# Altium PCB PC110.PcbDoc (part 3 of 24)
Units mm, origin at the board's own origin, x right, y up, seen from the top; angles counter-clockwise.
Board outline 150.05 x 107.35 mm, 10 copper layers (In2.Cu, F.Cu, B.Cu, In1.Cu, In3.Cu, In4.Cu, In5.Cu, In6.Cu, In7.Cu, In8.Cu); 936 components, 1434 nets, 4891 pads, 6088 vias.
Unrouted connection lines stored in the file: 2995.
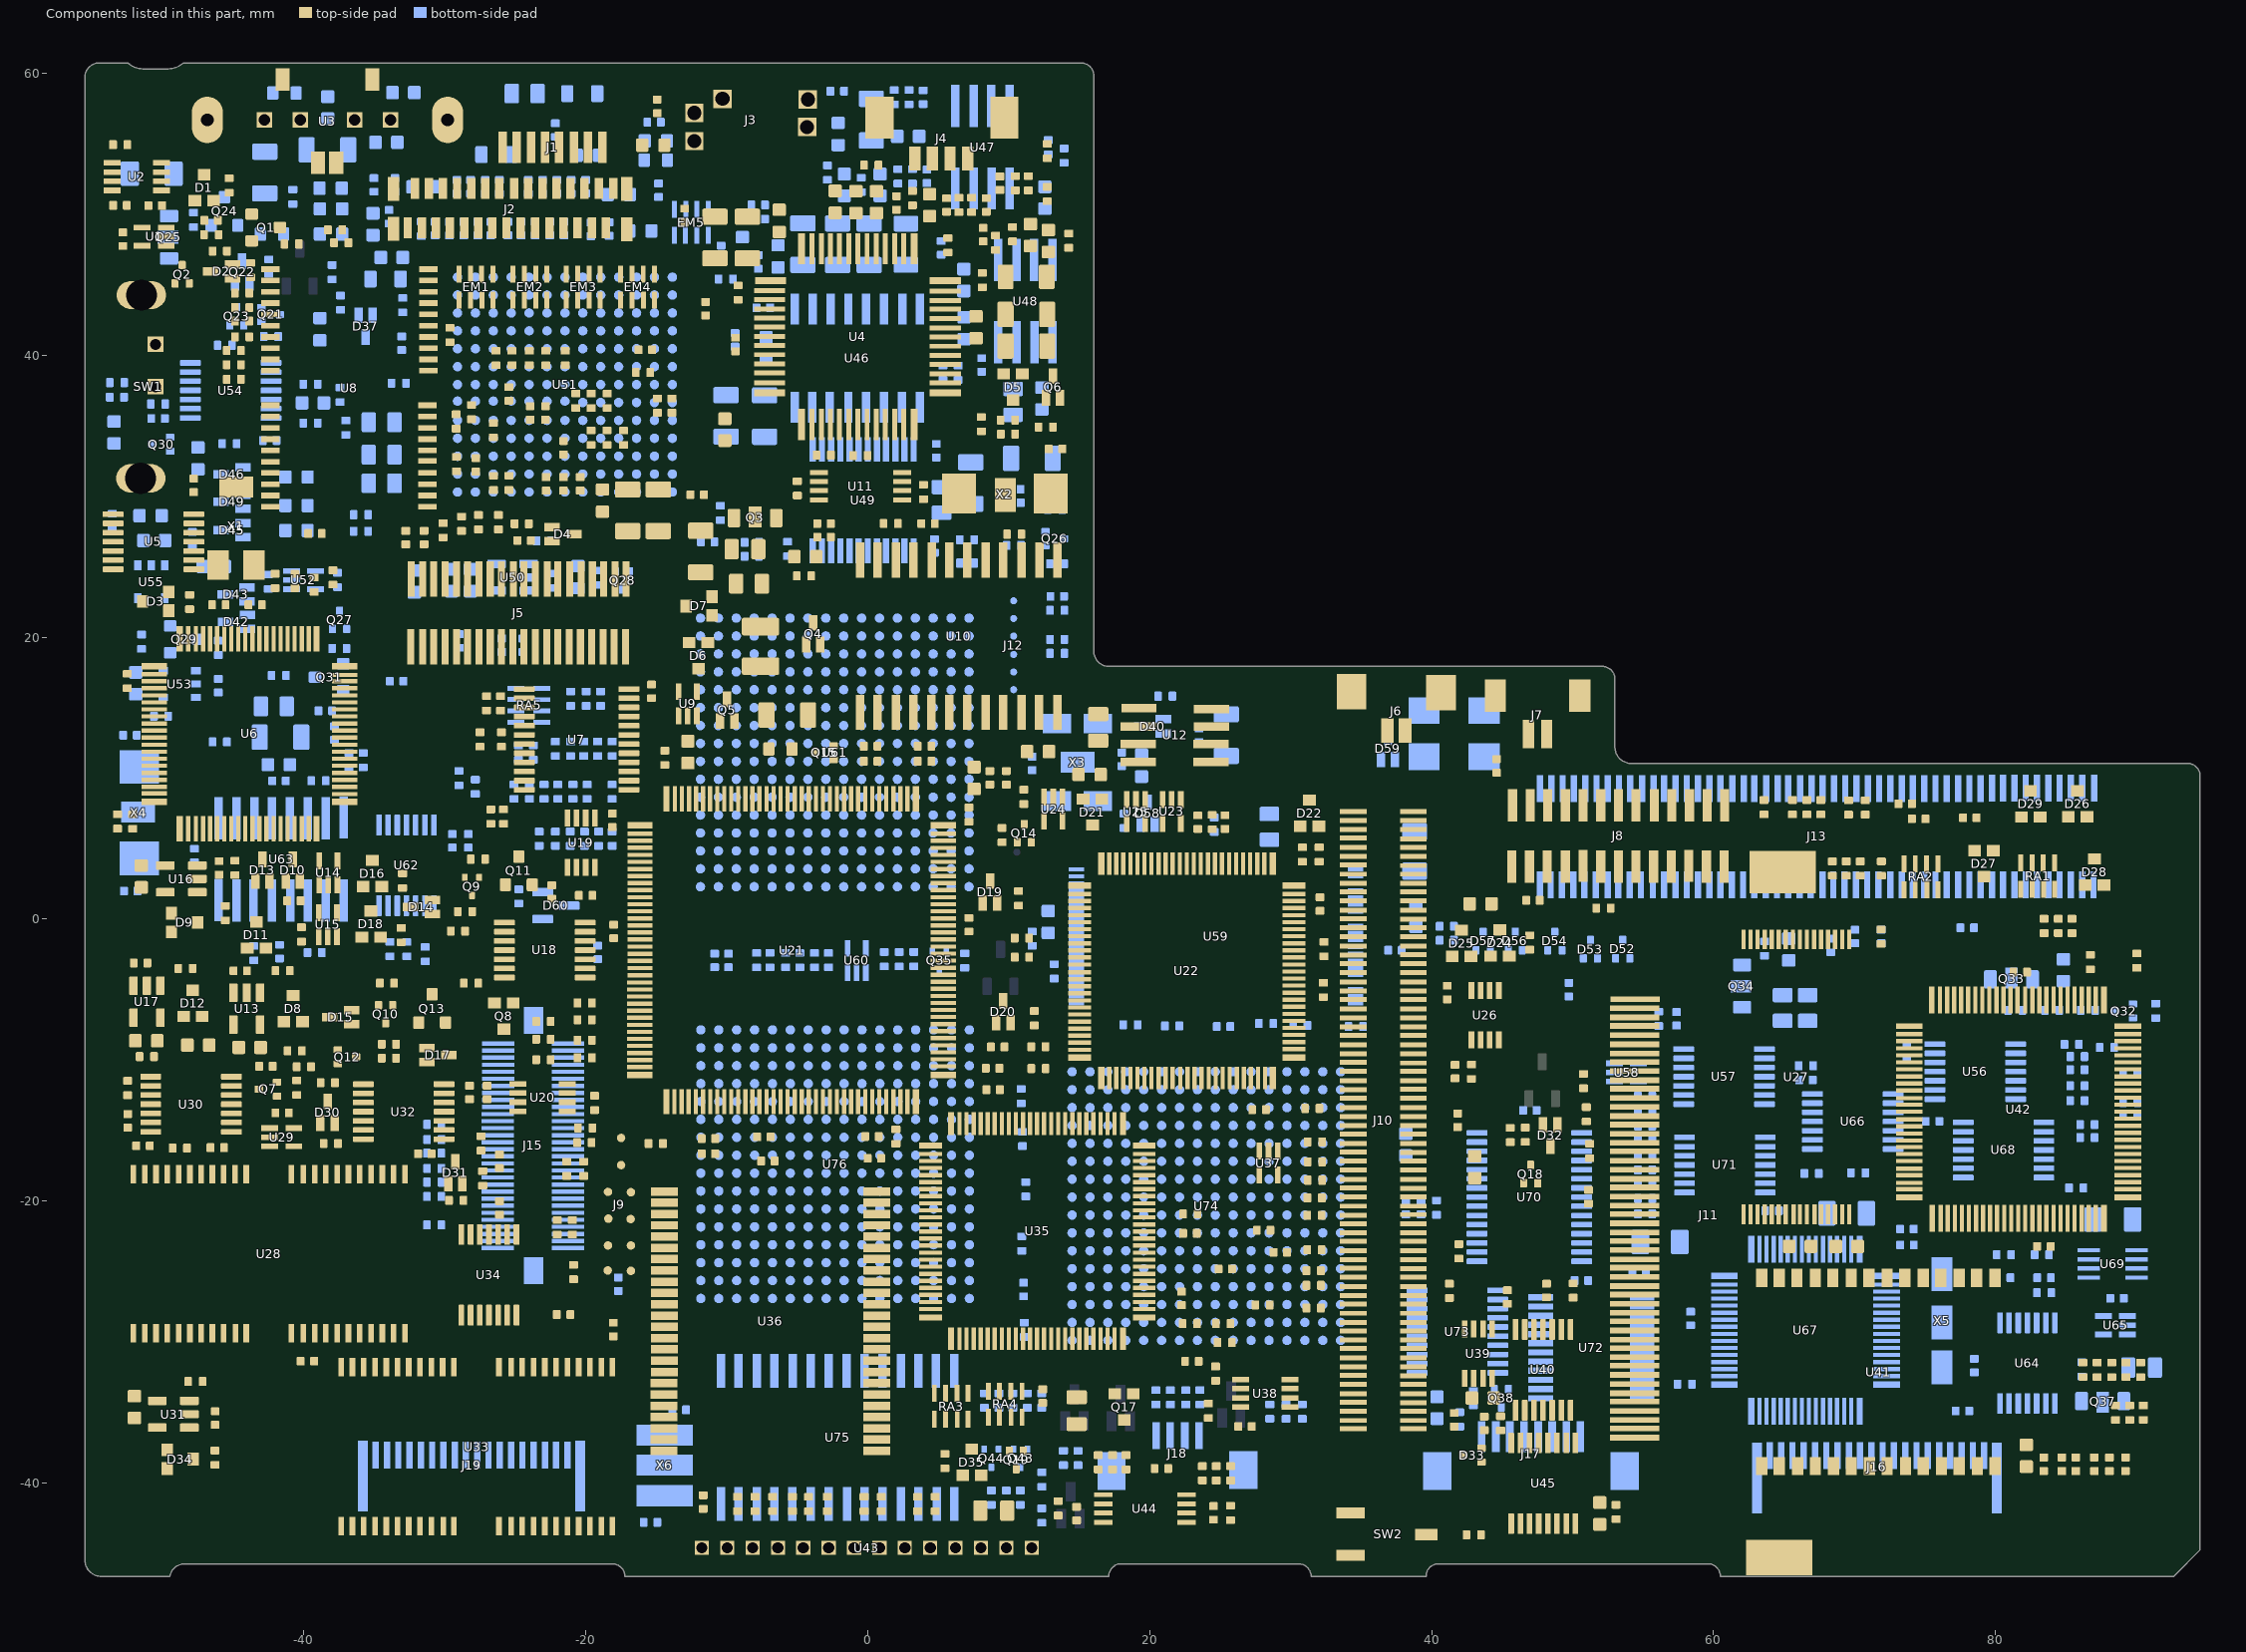
[diagram p11: the components of this part, seen from the top]

## Components (designator, comment, footprint, x,y, rotation, side; value= is the part's Value field where it differs from the comment) (continued)
R388 "Comment" R_0402_1005Metric#2 23.56,-33.91 r270 bottom value=3K
R389 "Comment" R_0402_1005Metric#2 30.82,-34.92 r270 bottom value=10k
R390 "Comment" R_0402_1005Metric#2 21.47,-33.91 r270 bottom value=100k
R391 "Comment" R_0402_1005Metric#2 12.35,-34.14 r270 bottom value=10k
R392 "Comment" R_0402_1005Metric#2 10.3,-34.14 r270 bottom value=22k
R393 "Comment" R_0402_1005Metric#2 11.2,-19.15 r270 bottom value=47k
R394 "Comment" R_0402_1005Metric#2 8.27,-34.14 r270 bottom value=DNP
R395 "Comment" R_0402_1005Metric#2 10.98,-15.58 r270 bottom value=10k
R396 "Comment" R_0402_1005Metric#2 11.1,-29.12 r270 bottom value=10k
R397 "Comment" R_0402_1005Metric#2 10.93,-23.01 r270 bottom value=47k
R398 "Comment" R_0402_1005Metric#2 9.3,-34.14 r270 bottom value=22k
R399 "Comment" R_0402_1005Metric#2 11.32,-34.14 r270 bottom value=22k
R400 "Comment" R_0402_1005Metric#2 -30.75,-15.63 r0 bottom value=DNP
R401 "Comment" R_0402_1005Metric#2 -30.75,-19.67 r0 bottom value=100k
R402 "Comment" R_0402_1005Metric#2 -30.75,-18.65 r0 bottom value=DNP
R403 "Comment" R_0402_1005Metric#2 -30.75,-16.59 r0 bottom value=DNP
R404 "Comment" R_0402_1005Metric#2 -30.75,-14.55 r0 bottom value=100k
R405 "Comment" R_0402_1005Metric#2 -30.75,-21.69 r0 bottom value=100k
R406 "Comment" R_0402_1005Metric#2 -30.75,-17.68 r0 bottom value=100k
R407 "Comment" R_0402_1005Metric#2 13.88,-38.21 r270 bottom value=100k
R408 "Comment" R_0402_1005Metric#2 14.91,-38.21 r270 bottom value=47k
R409 "Comment" R_0402_1005Metric#2 8.77,-41.03 r270 bottom value=2.2k
R410 "Comment" R_0402_1005Metric#2 9.82,-41.03 r270 bottom value=20k
R411 "Comment" R_0402_1005Metric#2 12.35,-42.3 r270 bottom value=47k
R412 "Comment" R_0402_1005Metric#2 10.83,-41.03 r270 bottom value=7.5k
R413 "Comment" R_0402_1005Metric#2 12.35,-39.74 r270 bottom value=100k
RA1 "Comment" R-array#1 82.96,2.98 r0 top value=47k
RA2 "Comment" R-array#1 74.68,2.94 r0 top value=10k
RA3 "Comment" R-array#1 5.9,-34.62 r0 top value=22k
RA4 "Comment" R-array#1 9.72,-34.47 r0 top value=10k
RA5 "Comment" R-array#2 -24.11,15.15 r270 bottom value=470k
SW1 "Comment" Switch -51.47,37.52 r0 top value=Switch
SW2 "Comment" LidSwitch 37.05,-43.64 r0 top value=LidSwitch
U1 "Comment" SOT-353#1 -50.61,48.41 r180 top value=EA
U2 "Comment" sso-8 -51.84,52.64 r180 top value=7W32
U3 "Comment" IRDA -38.35,55.15 r0 top value="HSDL-1000 X03"
U4 "Comment" QFN-52 -0.3,41.29 r0 top value=ES488F
U5 "Comment" TSSOP-14_4.4x5mm_P0.65mm#1 -50.67,26.77 r0 top value=74HC14
U6 "Comment" QFN-80 -43.65,13.13 r0 top value=M38223E4HP
U7 "Comment" TSSOP-24_6.1x7.8mm_P0.65mm -20.65,12.75 r0 top value=HD151015
U8 "Comment" GRAMchip -36.92,37.7 r90 top value=51W4260ATT7
U9 "Comment" SOT-353#1 -12.77,15.29 r90 top value=E4
U10 "Comment" SOP-24 6.75,20.72 r0 top value=YM3812
U11 "Comment" soic-8-small -0.51,30.69 r180 top value=NJM2904M
U12 "Comment" SOIC-8-narrow 22.04,13.16 r0 top value=LM4861
U13 "Comment" SOT-23-5#1 -44.05,-6.35 r270 top value=8C01
U14 "Comment" SOT-353#1 -38.26,3.3 r90 top value=EA
U15 "Comment" SOT-353#1 -38.3,-0.38 r90 top value=EA
U16 "Comment" SOT-23-5#1 -48.69,2.86 r180 top value=8C01
U17 "Comment" SOT-23-5#1 -51.13,-5.85 r270 top value=3E00
U18 "Comment" TSSOP-14_4.4x5mm_P0.65mm#1 -22.912,-2.19 r0 top value=VT74
U19 "Comment" sso-8 -20.31,5.44 r270 top value=7W126
U20 "Comment" sso-8 -23.07,-12.63 r0 top value=7W14
U21 "Comment" Bowman -5.18,-1.69 r0 top value=Bowman
U22 "Comment" FDC 22.93,-3.21 r0 top value=FDC37C665IR
U23 "Comment" SOT-353#1 21.56,7.65 r270 top value=EA
U24 "Comment" SOT-353#1 13.16,7.8 r270 top value=E4
U25 "Comment" SOT-353#1 19.02,7.63 r270 top value=E4
U26 "Comment" sso-8 43.77,-6.8 r90 top value=7W126
U27 "Comment" Flash-32 65.47,-11.43 r270 top value=AT29LV512-12TU
U28 "Comment" RAMchip -42.06,-23.57 r0 top value=M5M4V16160BTP
U29 "Comment" SOT-353#1 -41.56,-15.46 r0 top value=E2
U30 "Comment" TSSOP-14_4.4x5mm_P0.65mm#1 -47.998,-13.12 r0 top value=74LVT74
U31 "Comment" SOT-23-5#1 -49.26,-35.11 r180 top value=3F01
U32 "Comment" TSSOP-14_4.4x5mm_P0.65mm#1 -32.918,-13.65 r0 top value=V74
U33 "Comment" RAMchip -27.33,-37.25 r0 top value=M5M4V16160BTP
U34 "Comment" TSSOP-14_4.4x5mm_P0.65mm#1 -26.87,-25.222 r270 top value=74LV126
U35 "Comment" Pluto 12.01,-21.65 r0 top value=Pluto
U36 "Comment" SOP48 -6.67,-28.16 r0 top value=MSM538032E
U37 "Comment" SOT-353#1 28.43,-17.3 r270 top value=E8
U38 "Comment" sso-8 28.19,-33.65 r180 top value=7W14
U39 "Comment" sso-8 43.34,-30.8 r270 top value=7W00
U40 "Comment" TSSOP-14_4.4x5mm_P0.65mm#1 47.9,-31.962 r90 top value=SN74LS74a
U41 "Comment" SanDisk 72.31,-31.815 r0 top value=SDLB-4
U42 "Comment" QFN-100 82.11,-13.65 r0 top value=SC414281PU4
U43 "Comment" LCD 0.13,-44.59 r0 top value="Front LCD"
U44 "Comment" soic-8-small 19.66,-41.77 r0 top value=NJM2904M
U45 "Comment" TSSOP-16_4.4x5mm_P0.65mm 47.92,-40.01 r90 top value=SN74LS123A
U46 "Comment" SOP-16 -0.74,39.82 r90 bottom value=Y3014
U47 "Comment" SOIC-8 8.16,54.73 r90 bottom value=3414A
U48 "Comment" SOIC-8 11.21,43.81 r90 bottom value=DS1669
U49 "Comment" SSOP-24_5.3x8.2mm_P0.65mm -0.32,29.72 r270 bottom value=HD151015
U50 "Comment" SOT-23-5#2 -25.19,24.25 r0 bottom value=3T01
U51 "Comment" BGA-169 -21.48,37.92 r0 bottom value=CHIPS65535
U52 "Comment" SOT-353#2 -40.03,24.05 r180 bottom value=EA
U53 "Comment" TSOP-5_1.65x3.05mm_P0.95mm -48.81,16.68 r0 bottom value=3F01
U54 "Comment" TSSOP-14_4.4x5mm_P0.65mm#2 -45.193,37.51 r180 bottom value=SN74HC74
U55 "Comment" TSOP-5_1.65x3.05mm_P0.95mm -50.82,23.93 r90 bottom value=3T01
U56 "Comment" TSSOP-14_4.4x5mm_P0.65mm#2 78.56,-10.81 r0 bottom value=SN74LV32
U57 "Comment" TSSOP-14_4.4x5mm_P0.65mm#2 60.74,-11.17 r0 bottom value=SN74LVT125
U58 "Comment" SOT-353#2 53.83,-10.87 r180 bottom value=EA
U59 "Comment" Flash-40 24.59,-0.56 r0 bottom value=28F002BX
U60 "Comment" SOT-353#2 -0.79,-2.92 r270 bottom value=E3
U61 "Comment" BGA-256 -2.34,11.83 r0 bottom value=VL82C420
U62 "Comment" TSSOP-14_4.4x5mm_P0.65mm#2 -32.72,3.82 r270 bottom value=SN74LVT125
U63 "Comment" SOIC-16W -41.61,4.31 r90 bottom value=AV9154A-27
U64 "Comment" TSSOP-14_4.4x5mm_P0.65mm#2 82.26,-31.49 r90 bottom value=SN74LV126
U65 "Comment" SOT-353#2 88.51,-28.8 r0 bottom value=E4
U66 "Comment" TSSOP-14_4.4x5mm_P0.65mm#2 69.87,-14.35 r0 bottom value=SN74LV02
U67 "Comment" QFN64 66.26,-29.41 r90 bottom value=M38813M4
U68 "Comment" TSSOP-14_4.4x5mm_P0.65mm#2 80.567,-16.37 r0 bottom value=SN74LV08
U69 "Comment" SSOP-8_2.95x2.8mm_P0.65mm 88.31,-24.45 r0 bottom value=SN74LVC2G32
U70 "Comment" TSSOP-30_6.1x9.7mm_P0.65mm 46.932,-19.71 r0 bottom value=TPS2201
U71 "Comment" TSSOP-14_4.4x5mm_P0.65mm#2 60.8,-17.43 r180 bottom value=SN74LV32
U72 "Comment" SSOP-24_5.3x8.2mm_P0.65mm 51.33,-30.4 r0 bottom value=HD151015
U73 "Comment" TSSOP-20_4.4x6.5mm_P0.65mm 41.83,-29.25 r0 bottom value=SN74LVT244B
U74 "Comment" BGA-256 24.02,-20.345 r90 bottom value=RB5C396
U75 "Comment" SSOP-28 -2.56,-37.29 r0 bottom value=D17137AGT
U76 "Comment" BGA-256 -2.315,-17.375 r0 bottom value=486SX-33
X1 "Comment" XTAL-2 -44.83,30.66 r0 top value=245759
X2 "Comment" XTAL-1 9.72,30.09 r0 top value=89G6821
X3 "Comment" XTAL-3 14.88,11.13 r0 bottom value=32768
X4 "Comment" XTAL-6 -51.76,7.55 r270 bottom value=59G3482
X5 "Comment" XTAL-5 76.2,-28.59 r0 bottom value=4.00
X6 "Comment" XTAL-4 -14.56,-38.79 r0 bottom value=8.00

## Footprints (in the part's own frame and the unit in brackets; to place one, negate y for a bottom-side part, rotate by r counter-clockwise, add the part's x,y. Pads: shape width x height; smd on the part's side, far side on the other; paste and mask are expansions set on the pad)
3D [mm]
  rect 0.9x0.8 smd paste-0.9 mask+0: 1(0.625,-0.725) 2(-0.05,1.125) 3(-0.7,-0.725)
Audio-Jack [mm]
  rect 1.3x1.3 hole 1 paste-2539.97 mask+0: 1(3.95,2.95) 2(3.9,1) 3(-2.1,3) 4(-4.1,2) 5(-4.1,0)
  Edge.Cuts circle w0.254: c1.9,-2.05 r0.791
  Edge.Cuts circle w0.254: c1.9,1.95 r0.791
  Edge.Cuts circle w0.254: c-2.1,0.95 r0.791
  Edge.Cuts circle w0: c-2.1,0.95 r0.791
BGA-169 [mm]
  round 0.67 smd paste-0.67 mask+0: A1(-7.62,-7.62) A2(-7.62,-6.35) A3(-7.62,-5.08) A4(-7.62,-3.81) A5(-7.62,-2.54) A6(-7.62,-1.27) A7(-7.62,0) A8(-7.62,1.175) A9(-7.62,2.54) A10(-7.62,3.81) A11(-7.62,5.08) A12(-7.62,6.35) A13(-7.62,7.62) B1(-6.35,-7.62) B2(-6.35,-6.35) B3(-6.35,-5.08) B4(-6.35,-3.81) B5(-6.35,-2.54) B6(-6.35,-1.27) B7(-6.35,0) B8(-6.35,1.175) B9(-6.35,2.54) B10(-6.35,3.81) B11(-6.35,5.08) B12(-6.35,6.35) B13(-6.35,7.62) C1(-5.08,-7.62) C2(-5.08,-6.35) C3(-5.08,-5.08) C4(-5.08,-3.81) C5(-5.08,-2.54) C6(-5.08,-1.27) C7(-5.08,0) C8(-5.08,1.175) C9(-5.08,2.54) C10(-5.08,3.81) C11(-5.08,5.08) C12(-5.08,6.35) C13(-5.08,7.62) D1(-3.81,-7.62) D2(-3.81,-6.35) D3(-3.81,-5.08) D4(-3.81,-3.81) D5(-3.81,-2.54) D6(-3.81,-1.27) D7(-3.81,0) D8(-3.81,1.175) D9(-3.81,2.54) D10(-3.81,3.81) D11(-3.81,5.08) D12(-3.81,6.35) D13(-3.81,7.62) E1(-2.54,-7.62) E2(-2.54,-6.35) E3(-2.54,-5.08) E4(-2.54,-3.81) E5(-2.54,-2.54) E6(-2.54,-1.27) E7(-2.54,0) E8(-2.54,1.175) E9(-2.54,2.54) E10(-2.54,3.81) E11(-2.54,5.08) E12(-2.54,6.35) E13(-2.54,7.62) F1(-1.27,-7.62) F2(-1.27,-6.35) F3(-1.27,-5.08) F4(-1.27,-3.81) F5(-1.27,-2.54) F6(-1.27,-1.27) F7(-1.27,0) F8(-1.27,1.175) F9(-1.27,2.54) F10(-1.27,3.81) F11(-1.27,5.08) F12(-1.27,6.35) F13(-1.27,7.62) G1(0,-7.62) G2(0,-6.35) G3(0,-5.08) G4(0,-3.81) G5(0,-2.54) G6(0,-1.27) G7(0,0) G8(0,1.175) G9(0,2.54) G10(0,3.81) G11(0,5.08) G12(0,6.35) G13(0,7.62) H1(1.27,-7.62) H2(1.27,-6.35) H3(1.27,-5.08) H4(1.27,-3.81) H5(1.27,-2.54) H6(1.27,-1.27) H7(1.27,0) H8(1.27,1.27) H9(1.27,2.54) H10(1.27,3.81) H11(1.27,5.08) H12(1.27,6.35) H13(1.27,7.62) J1(2.54,-7.62) J2(2.54,-6.35) J3(2.54,-5.08) J4(2.54,-3.81) J5(2.54,-2.54) J6(2.54,-1.27) J7(2.54,0) J8(2.54,1.27) J9(2.54,2.54) J10(2.54,3.81) J11(2.54,5.08) J12(2.54,6.35) J13(2.54,7.62) K1(3.81,-7.62) K2(3.81,-6.35) K3(3.81,-5.08) K4(3.81,-3.81) K5(3.81,-2.54) K6(3.81,-1.27) K7(3.81,0) K8(3.81,1.27) K9(3.81,2.54) K10(3.81,3.81) K11(3.81,5.08) K12(3.81,6.35) K13(3.81,7.62) L1(5.08,-7.62) L2(5.08,-6.35) L3(5.08,-5.08) L4(5.08,-3.81) L5(5.08,-2.54) L6(5.08,-1.27) L7(5.08,0) L8(5.08,1.27) L9(5.08,2.54) L10(5.08,3.81) L11(5.08,5.08) L12(5.08,6.35) L13(5.08,7.62) M1(6.35,-7.62) M2(6.35,-6.35) M3(6.35,-5.08) M4(6.35,-3.81) M5(6.35,-2.54) M6(6.35,-1.27) M7(6.35,0) M8(6.35,1.27) M9(6.35,2.54) M10(6.35,3.81) M11(6.35,5.08) M12(6.35,6.35) M13(6.35,7.62) N1(7.62,-7.62) N2(7.62,-6.35) N3(7.62,-5.08) N4(7.62,-3.81) N5(7.62,-2.54) N6(7.62,-1.27) N7(7.62,0) N8(7.62,1.27) N9(7.62,2.54) N10(7.62,3.81) N11(7.62,5.08) N12(7.62,6.35) N13(7.62,7.62)
  silkscreen extent -9.4,-9.4 9.4,9.4
BGA-256 [mm]
  round 0.67 smd paste-0.67 mask+0: A1(-9.525,-9.525) A2(-9.525,-8.255) A3(-9.525,-6.985) A4(-9.525,-5.715) A5(-9.525,-4.445) A6(-9.525,-3.175) A7(-9.525,-1.905) A8(-9.525,-0.635) A9(-9.525,0.635) A10(-9.525,1.905) A11(-9.525,3.175) A12(-9.525,4.445) A13(-9.525,5.715) A14(-9.525,6.985) A15(-9.525,8.255) A16(-9.525,9.525) B1(-8.255,-9.525) B2(-8.255,-8.255) B3(-8.255,-6.985) B4(-8.255,-5.715) B5(-8.255,-4.445) B6(-8.255,-3.175) B7(-8.255,-1.905) B8(-8.255,-0.635) B9(-8.255,0.635) B10(-8.255,1.905) B11(-8.255,3.175) B12(-8.255,4.445) B13(-8.255,5.715) B14(-8.255,6.985) B15(-8.255,8.255) B16(-8.255,9.525) C1(-6.985,-9.525) C2(-6.985,-8.255) C3(-6.985,-6.985) C4(-6.985,-5.715) C5(-6.985,-4.445) C6(-6.985,-3.175) C7(-6.985,-1.905) C8(-6.985,-0.635) C9(-6.985,0.635) C10(-6.985,1.905) C11(-6.985,3.175) C12(-6.985,4.445) C13(-6.985,5.715) C14(-6.985,6.985) C15(-6.985,8.255) C16(-6.985,9.525) D1(-5.715,-9.525) D2(-5.715,-8.255) D3(-5.715,-6.985) D4(-5.715,-5.715) D5(-5.715,-4.445) D6(-5.715,-3.175) D7(-5.715,-1.905) D8(-5.715,-0.635) D9(-5.715,0.635) D10(-5.715,1.905) D11(-5.715,3.175) D12(-5.715,4.445) D13(-5.715,5.715) D14(-5.715,6.985) D15(-5.715,8.255) D16(-5.715,9.525) E1(-4.445,-9.525) E2(-4.445,-8.255) E3(-4.445,-6.985) E4(-4.445,-5.715) E5(-4.445,-4.445) E6(-4.445,-3.175) E7(-4.445,-1.905) E8(-4.445,-0.635) E9(-4.445,0.635) E10(-4.445,1.905) E11(-4.445,3.175) E12(-4.445,4.445) E13(-4.445,5.715) E14(-4.445,6.985) E15(-4.445,8.255) E16(-4.445,9.525) F1(-3.175,-9.525) F2(-3.175,-8.255) F3(-3.175,-6.985) F4(-3.175,-5.715) F5(-3.175,-4.445) F6(-3.175,-3.175) F7(-3.175,-1.905) F8(-3.175,-0.635) F9(-3.175,0.635) F10(-3.175,1.905) F11(-3.175,3.175) F12(-3.175,4.445) F13(-3.175,5.715) F14(-3.175,6.985) F15(-3.175,8.255) F16(-3.175,9.525) G1(-1.905,-9.525) G2(-1.905,-8.255) G3(-1.905,-6.985) G4(-1.905,-5.715) G5(-1.905,-4.445) G6(-1.905,-3.175) G7(-1.905,-1.905) G8(-1.905,-0.635) G9(-1.905,0.635) G10(-1.905,1.905) G11(-1.905,3.175) G12(-1.905,4.445) G13(-1.905,5.715) G14(-1.905,6.985) G15(-1.905,8.255) G16(-1.905,9.525) H1(-0.635,-9.525) H2(-0.635,-8.255) H3(-0.635,-6.985) H4(-0.635,-5.715) H5(-0.635,-4.445) H6(-0.635,-3.175) H7(-0.635,-1.905) H8(-0.635,-0.635) H9(-0.635,0.635) H10(-0.635,1.905) H11(-0.635,3.175) H12(-0.635,4.445) H13(-0.635,5.715) H14(-0.635,6.985) H15(-0.635,8.255) H16(-0.635,9.525) J1(0.635,-9.525) J2(0.635,-8.255) J3(0.635,-6.985) J4(0.635,-5.715) J5(0.635,-4.445) J6(0.635,-3.175) J7(0.635,-1.905) J8(0.635,-0.635) J9(0.635,0.635) J10(0.635,1.905) J11(0.635,3.175) J12(0.635,4.445) J13(0.635,5.715) J14(0.635,6.985) J15(0.635,8.255) J16(0.635,9.525) K1(1.905,-9.525) K2(1.905,-8.255) K3(1.905,-6.985) K4(1.905,-5.715) K5(1.905,-4.445) K6(1.905,-3.175) K7(1.905,-1.905) K8(1.905,-0.635) K9(1.905,0.635) K10(1.905,1.905) K11(1.905,3.175) K12(1.905,4.445) K13(1.905,5.715) K14(1.905,6.985) K15(1.905,8.255) K16(1.905,9.525) L1(3.175,-9.525) L2(3.175,-8.255) L3(3.175,-6.985) L4(3.175,-5.715) L5(3.175,-4.445) L6(3.175,-3.175) L7(3.175,-1.905) L8(3.175,-0.635) L9(3.175,0.635) L10(3.175,1.905) L11(3.175,3.175) L12(3.175,4.445) L13(3.175,5.715) L14(3.175,6.985) L15(3.175,8.255) L16(3.175,9.525) M1(4.445,-9.525) M2(4.445,-8.255) M3(4.445,-6.985) M4(4.445,-5.715) M5(4.445,-4.445) M6(4.445,-3.175) M7(4.445,-1.905) M8(4.445,-0.635) M9(4.445,0.635) M10(4.445,1.905) M11(4.445,3.175) M12(4.445,4.445) M13(4.445,5.715) M14(4.445,6.985) M15(4.445,8.255) M16(4.445,9.525) N1(5.715,-9.525) N2(5.715,-8.255) N3(5.715,-6.985) N4(5.715,-5.715) N5(5.715,-4.445) N6(5.715,-3.175) N7(5.715,-1.905) N8(5.715,-0.635) N9(5.715,0.635) N10(5.715,1.905) N11(5.715,3.175) N12(5.715,4.445) N13(5.715,5.715) N14(5.715,6.985) N15(5.715,8.255) N16(5.715,9.525) P1(6.985,-9.525) P2(6.985,-8.255) P3(6.985,-6.985) P4(6.985,-5.715) P5(6.985,-4.445) P6(6.985,-3.175) P7(6.985,-1.905) P8(6.985,-0.635) P9(6.985,0.635) P10(6.985,1.905) P11(6.985,3.175) P12(6.985,4.445) P13(6.985,5.715) P14(6.985,6.985) P15(6.985,8.255) P16(6.985,9.525) R1(8.255,-9.525) R2(8.255,-8.255) R3(8.255,-6.985) R4(8.255,-5.715) R5(8.255,-4.445) R6(8.255,-3.175) R7(8.255,-1.905) R8(8.255,-0.635) R9(8.255,0.635) R10(8.255,1.905) R11(8.255,3.175) R12(8.255,4.445) R13(8.255,5.715) R14(8.255,6.985) R15(8.255,8.255) R16(8.255,9.525) T1(9.525,-9.525) T2(9.525,-8.255) T3(9.525,-6.985) T4(9.525,-5.715) T5(9.525,-4.445) T6(9.525,-3.175) T7(9.525,-1.905) T8(9.525,-0.635) T9(9.525,0.635) T10(9.525,1.905) T11(9.525,3.175) T12(9.525,4.445) T13(9.525,5.715) T14(9.525,6.985) T15(9.525,8.255) T16(9.525,9.525)
  silkscreen extent -11.3,-11.3 11.43,11.43
Bowman [mm]
  rect 1.8x0.45 smd paste-1.8 mask+0: 1(-10.973,8.35) 36(-11,-9.35) 73(10.55,-9.35) 108(10.55,8.35)
  rect 1.8x0.3 smd paste-1.8 mask+0: 2(-10.973,7.75) 3(-10.973,7.25) 4(-10.973,6.757) 5(-10.973,6.25) 6(-10.973,5.75) 7(-10.973,5.25) 8(-10.973,4.75) 9(-10.973,4.25) 10(-10.973,3.75) 11(-10.973,3.252) 12(-10.973,2.75) 13(-10.973,2.25) 14(-10.973,1.75) 15(-10.973,1.25) 16(-10.973,0.75) 17(-10.973,0.25) 18(-10.973,-0.253) 19(-10.973,-0.761) 20(-10.973,-1.269) 21(-10.973,-1.777) 22(-10.973,-2.285) 23(-11,-2.793) 24(-11,-3.3) 25(-11,-3.8) 26(-11,-4.3) 27(-11,-4.8) 28(-11,-5.3) 29(-11,-5.8) 30(-11,-6.3) 31(-11,-6.8) 32(-11,-7.3) 33(-11,-7.8) 34(-11,-8.3) 35(-11,-8.8) 74(10.55,-8.75) 75(10.55,-8.25) 76(10.55,-7.75) 77(10.55,-7.25) 78(10.55,-6.75) 79(10.55,-6.25) 80(10.55,-5.75) 81(10.55,-5.25) 82(10.55,-4.75) 83(10.55,-4.25) 84(10.55,-3.75) 85(10.55,-3.25) 86(10.55,-2.75) 87(10.55,-2.25) 88(10.55,-1.75) 89(10.55,-1.25) 90(10.55,-0.75) 91(10.55,-0.25) 92(10.55,0.25) 93(10.55,0.75) 94(10.55,1.25) 95(10.55,1.75) 96(10.55,2.25) 97(10.55,2.75) 98(10.55,3.25) 99(10.55,3.75) 100(10.55,4.25) 101(10.55,4.75) 102(10.55,5.25) 103(10.55,5.75) 104(10.55,6.25) 105(10.55,6.75) 106(10.55,7.25) 107(10.55,7.75)
  rect 0.45x1.8 smd paste-1.8 mask+0: 37(-9.1,-11.25) 72(8.6,-11.25) 109(8.6,10.225) 144(-9.1,10.225)
  rect 0.3x1.8 smd paste-1.8 mask+0: 38(-8.534,-11.25) 39(-8.026,-11.25) 40(-7.518,-11.25) 41(-7.01,-11.25) 42(-6.502,-11.25) 43(-5.994,-11.25) 44(-5.5,-11.25) 45(-5,-11.25) 46(-4.5,-11.25) 47(-4,-11.25) 48(-3.5,-11.25) 49(-3,-11.25) 50(-2.5,-11.25) 51(-2,-11.25) 52(-1.5,-11.25) 53(-1,-11.25) 54(-0.5,-11.25) 55(0,-11.25) 56(0.5,-11.25) 57(1,-11.25) 58(1.5,-11.25) 59(2,-11.25) 60(2.5,-11.25) 61(3,-11.25) 62(3.5,-11.25) 63(4,-11.25) 64(4.5,-11.25) 65(5,-11.25) 66(5.5,-11.25) 67(6,-11.25) 68(6.5,-11.25) 69(7,-11.25) 70(7.5,-11.25) 71(8,-11.25) 110(8,10.225) 111(7.5,10.225) 112(7,10.225) 113(6.5,10.225) 114(6,10.225) 115(5.5,10.225) 116(5,10.225) 117(4.5,10.225) 118(4,10.225) 119(3.5,10.225) 120(3,10.225) 121(2.5,10.225) 122(2,10.225) 123(1.5,10.225) 124(1,10.225) 125(0.5,10.225) 126(0,10.225) 127(-0.5,10.225) 128(-1,10.225) 129(-1.5,10.225) 130(-2,10.225) 131(-2.5,10.225) 132(-3,10.225) 133(-3.5,10.225) 134(-4,10.225) 135(-4.5,10.225) 136(-5,10.225) 137(-5.5,10.225) 138(-6,10.225) 139(-6.5,10.225) 140(-7,10.225) 141(-7.5,10.225) 142(-8,10.225) 143(-8.5,10.225)
  silkscreen extent -9.22,7.78 -8.38,8.62
BridgeBatt [mm]
  rect 0.9x1.7 smd paste-1.7 mask+0: 1(0.65,-1.2) 2(-0.6,-1.2)
  rect 2.1x2.5 smd paste-2.5 mask+0: 3(3.2,1.5) 4(-3.15,1.55)
C_0402_1005Metric#1 [mm]
  rrect25% 0.56x0.62 smd paste-0.62 mask+0: 1(-0.48,0) 2(0.48,0)
  silkscreen extent -0.11,-0.36 0.11,0.36
C_0402_1005Metric#2 [mm]
  rrect25% 0.56x0.62 smd paste-0.62 mask+0: 1(0.48,0) 2(-0.48,0)
  silkscreen extent -0.11,-0.36 0.11,0.36
C_0603_1608Metric#1 [mm]
  rrect25% 0.9x0.95 smd paste-0.95 mask+0: 1(-0.775,0) 2(0.775,0)
  silkscreen extent -0.14,-0.51 0.14,0.51
C_0603_1608Metric#2 [mm]
  rrect25% 0.9x0.95 smd paste-0.95 mask+0: 1(0.775,0) 2(-0.775,0)
  silkscreen extent -0.14,-0.51 0.14,0.51
C_0805_2012Metric#1 [mm]
  rrect25% 1x1.45 smd paste-1.45 mask+0: 1(-0.95,0) 2(0.95,0)
  silkscreen extent -0.26,-0.73 0.26,0.73
C_0805_2012Metric#2 [mm]
  rrect25% 1x1.45 smd paste-1.45 mask+0: 1(0.95,0) 2(-0.95,0)
  silkscreen extent -0.26,-0.73 0.26,0.73
C_1206_3216Metric#1 [mm]
  rrect22% 1.15x1.8 smd paste-1.8 mask+0: 1(-1.475,0) 2(1.475,0)
  silkscreen extent -0.71,-0.91 0.71,0.91
C_1206_3216Metric#2 [mm]
  rrect22% 1.15x1.8 smd paste-1.8 mask+0: 1(1.475,0) 2(-1.475,0)
  silkscreen extent -0.71,-0.91 0.71,0.91
CF-card [mm]
  rect 0.4x3.5 smd paste-3.5 mask+0: 1(16.65,-5.2) 2(16,-5.2) 3(15.4,-5.2) 4(14.75,-5.2) 5(14.1,-5.2) 6(13.5,-5.2) 7(12.85,-5.2) 8(12.2,-5.2) 9(11.55,-5.2) 10(10.95,-5.2) 11(10.3,-5.2) 12(9.7,-5.2) 13(9.05,-5.2) 14(8.4,-5.2) 15(7.8,-5.2) 16(7.15,-5.2) 17(6.5,-5.2) 18(5.9,-5.2) 19(5.25,-5.2) 20(4.6,-5.2) 21(4,-5.2) 22(3.35,-5.2) 23(2.7,-5.2) 24(2.1,-5.2) 25(1.45,-5.2) 26(0.8,-5.2) 27(0.2,-5.2) 28(-0.45,-5.2) 29(-1.1,-5.2) 30(-1.7,-5.2) 31(-2.35,-5.2) 32(-3,-5.2) 33(-3.65,-5.2) 34(-4.25,-5.2) 35(-4.9,-5.2) 36(-5.55,-5.2) 37(-6.15,-5.2) 38(-6.8,-5.2) 39(-7.45,-5.2) 40(-8.1,-5.2) 41(-8.7,-5.2) 42(-9.35,-5.2) 43(-10,-5.2) 44(-10.6,-5.2) 45(-11.25,-5.2) 46(-11.9,-5.2) 47(-12.55,-5.2) 48(-13.15,-5.2) 49(-13.8,-5.2) 50(-14.45,-5.15)
  rect 3x4.7 smd paste-4.7 mask+0: 51(-23.45,5.3)
  rect 2.5x4.7 smd paste-4.7 mask+0: 52(25.15,5.05)
  silkscreen extent 17.49,-7.96 18.21,-7.24
connector-4 [mm]
  rect 0.8x1.7 smd paste-1.7 mask+0: 1(-1.9,-1.7) 2(-0.65,-1.7) 3(0.6,-1.7) 4(1.85,-1.7)
  rect 2x3 smd paste-3 mask+0: 5(-4.4,1.2) 6(4.45,1.2)
D_0603_1608Metric#1 [mm]
  rrect25% 0.875x0.95 smd paste-0.95 mask+0: 1(-0.787,0) 2(0.787,0)
  silkscreen extent -1.49,-0.73 0.8,0.73
D_0603_1608Metric#2 [mm]
  rrect25% 0.875x0.95 smd paste-0.95 mask+0: 1(0.787,0) 2(-0.787,0)
  silkscreen extent -0.8,-0.73 1.49,0.73
Debug-6 [mm]
  round 0.5 smd paste-0.5 mask+0: 1(0.05,-3.15) 2(0.05,-1.9) 3(0.05,-0.65) 4(0.05,0.65) 5(0.05,1.9) 6(0.05,3.15)
Debug-10 [mm]
  round 0.6 smd paste-0.6 mask+0: 1(0.075,4.825) 2(0.075,2.9) 3(0.775,0.975) 4(-0.85,1) 5(0.75,-0.925) 6(-0.825,-0.9) 7(0.775,-2.8) 8(-0.85,-2.8) 9(0.775,-4.6) 10(-0.875,-4.575)
Diode [mm]
  rect 2.2x1.9 smd paste-2.2 mask+0: 1(2.1,0.05) 2(-2.15,0.05)
  silkscreen extent 0.75,-0.85 0.75,0.85
"Docking Port" [mm]
  rect 0.45x1.9 smd paste-1.9 mask+0: 1(19.2,-3.25) 2(18.35,-3.25) 3(17.55,-3.25) 4(16.75,-3.25) 5(15.95,-3.25) 6(15.15,-3.25) 7(14.35,-3.25) 8(13.55,-3.25) 9(12.75,-3.25) 10(11.95,-3.25) 11(11.15,-3.2) 12(10.35,-3.2) 13(9.55,-3.2) 14(8.75,-3.2) 15(7.95,-3.2) 16(7.15,-3.2) 17(6.35,-3.2) 18(5.55,-3.2) 19(4.75,-3.2) 20(3.95,-3.2) 21(3.15,-3.2) 22(2.35,-3.2) 23(1.55,-3.2) 24(0.75,-3.2) 25(-0.05,-3.2) 26(-0.85,-3.2) 27(-1.65,-3.2) 28(-2.5,-3.2) 29(-3.25,-3.2) 30(-4.05,-3.2) 31(-4.9,-3.2) 32(-5.65,-3.2) 33(-6.45,-3.2) 34(-7.3,-3.2) 35(-8.1,-3.2) 36(-8.9,-3.2) 37(-9.7,-3.2) 38(-10.5,-3.2) 39(-11.3,-3.2) 40(-12.05,-3.2) 41(-12.85,-3.2) 42(-13.7,-3.2) 43(-14.5,-3.2) 44(-15.3,-3.2) 45(-16.1,-3.2) 46(-16.9,-3.2) 47(-17.7,-3.2) 48(-18.5,-3.2) 49(-19.3,-3.2) 50(-20.1,-3.2) 51(-20.1,3.6) 52(-19.35,3.6) 53(-18.55,3.6) 54(-17.75,3.6) 55(-16.95,3.6) 56(-16.15,3.6) 57(-15.3,3.6) 58(-14.55,3.6) 59(-13.75,3.6) 60(-12.95,3.6) 61(-12.1,3.6) 62(-11.3,3.6) 63(-10.5,3.6) 64(-9.7,3.6) 65(-8.9,3.6) 66(-8.1,3.6) 67(-7.3,3.6) 68(-6.5,3.6) 69(-5.7,3.6) 70(-4.9,3.6) 71(-4.1,3.6) 72(-3.3,3.6) 73(-2.5,3.6) 74(-1.7,3.6) 75(-0.9,3.6) 76(-0.05,3.6) 77(0.7,3.6) 78(1.5,3.6) 79(2.3,3.6) 80(3.1,3.6) 81(3.9,3.6) 82(4.75,3.6) 83(5.55,3.6) 84(6.35,3.6) 85(7.15,3.6) 86(7.95,3.6) 87(8.75,3.6) 88(9.55,3.6) 89(10.35,3.6) 90(11.15,3.6) 91(11.95,3.6) 92(12.75,3.6) 93(13.55,3.6) 94(14.35,3.6) 95(15.15,3.6) 96(15.95,3.6) 97(16.75,3.6) 98(17.55,3.6) 99(18.35,3.6) 100(19.15,3.6)
FDC [mm]
  rect 0.45x1.6 smd paste-1.6 mask+0: 1(5.8,7.15) 25(-6.35,7.15) 51(-6.35,-8.05) 75(5.8,-8.05)
  rect 0.3x1.6 smd paste-1.6 mask+0: 2(5.2,7.15) 3(4.7,7.15) 4(4.2,7.15) 5(3.7,7.15) 6(3.2,7.15) 7(2.7,7.15) 8(2.2,7.15) 9(1.7,7.15) 10(1.2,7.15) 11(0.7,7.15) 12(0.2,7.15) 13(-0.3,7.15) 14(-0.8,7.15) 15(-1.3,7.15) 16(-1.8,7.15) 17(-2.3,7.15) 18(-2.8,7.15) 19(-3.3,7.15) 20(-3.8,7.15) 21(-4.3,7.15) 22(-4.8,7.15) 23(-5.3,7.15) 24(-5.8,7.15) 52(-5.8,-8.05) 53(-5.3,-8.05) 54(-4.8,-8.05) 55(-4.3,-8.05) 56(-3.8,-8.05) 57(-3.3,-8.05) 58(-2.8,-8.05) 59(-2.3,-8.05) 60(-1.8,-8.05) 61(-1.3,-8.05) 62(-0.75,-8.05) 63(-0.25,-8.05) 64(0.25,-8.05) 65(0.75,-8.05) 66(1.25,-8.05) 67(1.75,-8.05) 68(2.25,-8.05) 69(2.75,-8.05) 70(3.25,-8.05) 71(3.75,-8.05) 72(4.25,-8.05) 73(4.75,-8.05) 74(5.25,-8.05)
  rect 1.6x0.45 smd paste-1.6 mask+0: 26(-7.9,5.6) 50(-7.9,-6.6) 76(7.3,-6.6) 100(7.3,5.6)
  rect 1.6x0.3 smd paste-1.6 mask+0: 27(-7.9,5) 28(-7.9,4.5) 29(-7.9,4) 30(-7.9,3.5) 31(-7.9,3) 32(-7.9,2.5) 33(-7.9,2) 34(-7.9,1.5) 35(-7.9,1) 36(-7.9,0.5) 37(-7.9,0) 38(-7.9,-0.55) 39(-7.9,-1.05) 40(-7.9,-1.55) 41(-7.9,-2.05) 42(-7.9,-2.55) 43(-7.9,-3.05) 44(-7.9,-3.55) 45(-7.9,-4.05) 46(-7.9,-4.55) 47(-7.9,-5.05) 48(-7.9,-5.55) 49(-7.9,-6.05) 77(7.3,-6) 78(7.3,-5.5) 79(7.3,-5) 80(7.3,-4.5) 81(7.3,-4) 82(7.3,-3.5) 83(7.3,-3) 84(7.3,-2.5) 85(7.3,-2) 86(7.3,-1.5) 87(7.3,-1) 88(7.3,-0.5) 89(7.3,0) 90(7.3,0.5) 91(7.3,1) 92(7.3,1.5) 93(7.3,2) 94(7.3,2.5) 95(7.3,3) 96(7.3,3.5) 97(7.3,4) 98(7.3,4.5) 99(7.3,5)
  silkscreen extent 5.06,4.86 6.04,5.84
Flash-32 [mm]
  rect 1.4x0.3 smd paste-1.4 mask+0: 1(-10,4.15) 2(-10,3.65) 3(-10,3.15) 4(-10,2.65) 5(-10,2.15) 6(-10,1.65) 7(-10,1.15) 8(-10,0.65) 9(-10,0.15) 10(-10,-0.35) 11(-10,-0.85) 12(-10,-1.35) 13(-10,-1.85) 14(-10,-2.35) 15(-10,-2.85) 16(-10,-3.35) 17(9.5,-3.35) 18(9.5,-2.85) 19(9.5,-2.35) 20(9.5,-1.85) 21(9.5,-1.35) 22(9.5,-0.85) 23(9.5,-0.35) 24(9.5,0.2) 25(9.5,0.65) 26(9.5,1.15) 27(9.5,1.7) 28(9.5,2.15) 29(9.5,2.65) 30(9.5,3.15) 31(9.5,3.65) 32(9.5,4.15)
  silkscreen extent -8.84,3.36 -8.26,3.94
Flash-40 [mm]
  rect 1.1x0.3 smd paste-1.1 mask+0: 1(-9.8,5.4) 2(-9.8,4.9) 3(-9.8,4.4) 4(-9.8,3.9) 5(-9.8,3.4) 6(-9.8,2.9) 7(-9.8,2.4) 8(-9.8,1.9) 9(-9.8,1.4) 10(-9.8,0.9) 11(-9.8,0.4) 12(-9.8,-0.1) 13(-9.8,-0.6) 14(-9.8,-1.1) 15(-9.8,-1.6) 16(-9.8,-2.1) 17(-9.8,-2.6) 18(-9.8,-3.1) 19(-9.8,-3.6) 20(-9.8,-4.1) 21(10,-4.1) 22(10,-3.6) 23(10,-3.1) 24(10,-2.6) 25(10,-2.1) 26(10,-1.6) 27(10,-1.1) 28(10,-0.6) 29(10,-0.1) 30(10,0.4) 31(10,0.9) 32(10,1.4) 33(10,1.9) 34(10,2.4) 35(10,2.9) 36(10,3.4) 37(10,3.9) 38(10,4.4) 39(10,4.9) 40(10,5.4)
  silkscreen extent -8.78,4.97 -8.22,5.53
Flat-4 [mm]
  rect 0.55x1.9 smd paste-1.9 mask+0: 1(1.55,-2.75) 2(0.55,-2.75) 3(-0.5,-2.75) 4(-1.5,-2.75)
  rect 2x2.7 smd paste-2.7 mask+0: 5(-4.65,-0.25) 6(4.7,-0.3)
Flat-8 [mm]
  rect 0.55x2.2 smd paste-2.2 mask+0: 1(3.6,-1.7) 2(2.6,-1.7) 3(1.6,-1.7) 4(0.6,-1.7) 5(-0.4,-1.7) 6(-1.4,-1.7) 7(-2.4,-1.7) 8(-3.4,-1.7)
  rect 2x2.7 smd paste-2.7 mask+0: 9(-6.55,0.75) 10(6.75,0.75)
Flat-18 [mm]
  rect 0.45x1.9 smd paste-1.9 mask+0: 1(7,-1.6) 2(6.2,-1.6) 3(5.4,-1.6) 4(4.6,-1.6) 5(3.8,-1.6) 6(3,-1.6) 7(2.2,-1.6) 8(1.4,-1.6) 9(0.6,-1.6) 10(-0.2,-1.6) 11(-1,-1.6) 12(-1.8,-1.6) 13(-2.6,-1.6) 14(-3.4,-1.6) 15(-4.2,-1.6) 16(-5,-1.6) 17(-5.8,-1.6) 18(-6.6,-1.6)
  rect 0.7x5 smd paste-5 mask+0: 19(-7.5,-0.1) 20(7.9,-0.1)
Flat-20 [mm]
  rect 0.45x1.9 smd paste-1.9 mask+0: 1(7.6,-1.3) 2(6.8,-1.3) 3(6,-1.3) 4(5.2,-1.3) 5(4.4,-1.3) 6(3.6,-1.3) 7(2.8,-1.3) 8(2,-1.3) 9(1.2,-1.3) 10(0.4,-1.3) 11(-0.4,-1.3) 12(-1.2,-1.3) 13(-2,-1.3) 14(-2.8,-1.3) 15(-3.6,-1.3) 16(-4.4,-1.3) 17(-5.2,-1.3) 18(-6,-1.3) 19(-6.8,-1.3) 20(-7.6,-1.3)
  rect 0.7x5 smd paste-5 mask+0: 21(-8.5,0.3) 22(8.5,0.3)
Fuse_1206_3216Metric [mm]
  rrect20% 1.25x1.75 smd paste-1.75 mask+0: 1(1.4,0) 2(-1.4,0)
  silkscreen extent -0.6,-0.91 0.6,0.91
GRAMchip [mm]
  rect 0.4x1.3 smd paste-1.3 mask+0: 1(8.4,5.45) 2(7.6,5.45) 3(6.8,5.45) 4(6,5.45) 5(5.2,5.45) 6(4.4,5.45) 7(3.6,5.45) 8(2.8,5.45) 9(2,5.45) 10(1.2,5.45) 11(-1.25,5.45) 12(-2.05,5.45) 13(-2.85,5.45) 14(-3.65,5.45) 15(-4.45,5.45) 16(-5.25,5.45) 17(-6.05,5.45) 18(-6.85,5.45) 19(-7.65,5.45) 20(-8.45,5.45) 21(-8.45,-5.7) 22(-7.65,-5.7) 23(-6.85,-5.7) 24(-6.05,-5.7) 25(-5.2,-5.7) 26(-4.45,-5.7) 27(-3.65,-5.7) 28(-2.85,-5.7) 29(-2.05,-5.7) 30(-1.25,-5.7) 31(1.2,-5.75) 32(2,-5.75) 33(2.8,-5.75) 34(3.6,-5.75) 35(4.4,-5.75) 36(5.2,-5.75) 37(6,-5.75) 38(6.8,-5.75) 39(7.6,-5.75) 40(8.4,-5.75)
  silkscreen extent 7.84,3.54 8.56,4.26
IRDA [mm]
  rect 1x1.6 smd paste-1.6 mask+0: 1(0.65,-1.5) 2(-0.65,-1.5) 3(3.2,4.4) 4(-3.15,4.4)
  rect 1.1x1.1 hole 0.8 paste-2539.97 mask+0: 5(4.5,1.55) 6(1.95,1.55) 7(-1.9,1.55) 8(-4.45,1.55)
  rrect100% 2.2x3.3 hole 0.9 slot 2 at 90 deg paste-2539.97 mask+0: 9(8.55,1.55) 10(-8.5,1.55)
  Edge.Cuts circle w0.254: c7.25,-1.011 r0.461
  Edge.Cuts circle w0.254: c-7.25,-1 r0.461
  Edge.Cuts circle w0: c-7.25,-1 r0.461
L_0603_1608Metric#1 [mm]
  rrect25% 0.875x0.95 smd paste-0.95 mask+0: 1(-0.787,0) 2(0.787,0)
  silkscreen extent -0.16,-0.51 0.16,0.51
L_0603_1608Metric#2 [mm]
  rrect25% 0.875x0.95 smd paste-0.95 mask+0: 1(0.787,0) 2(-0.787,0)
  silkscreen extent -0.16,-0.51 0.16,0.51
L_0805_2012Metric [mm]
  rrect25% 0.875x1.2 smd paste-1.2 mask+0: 1(1.062,0) 2(-1.062,0)
  silkscreen extent -0.4,-0.56 0.4,0.56
L_1210_3225Metric [mm]
  rrect20% 1.25x2.65 smd paste-2.65 mask+0: 1(-1.4,0) 2(1.4,0)
  silkscreen extent -2.4,-1.7 2.4,1.7
LCD [mm]
  rect 1x1 hole 0.8 paste-2539.97 mask+0: 1(-11.9,0) 2(-10.1,0) 3(-8.3,0) 4(-6.5,0) 5(-4.7,0) 6(-2.9,0) 7(-1.1,0) 8(0.7,0) 9(2.5,0) 10(4.3,0) 11(6.1,0) 12(7.9,0) 13(9.7,0) 14(11.5,0)
LCD_connector [mm]
  rect 0.6x1.5 smd paste-1.5 mask+0: 1(-7.4,-1.25) 2(-6.9,1.55) 3(-6.4,-1.25) 4(-5.9,1.55) 5(-5.4,-1.25) 6(-4.9,1.55) 7(-4.4,-1.25) 8(-3.9,1.55) 9(-3.4,-1.25) 10(-2.9,1.55) 11(-2.4,-1.25) 12(-1.9,1.55) 13(-1.4,-1.25) 14(-0.9,1.55) 15(-0.4,-1.25) 16(0.15,1.55) 17(0.6,-1.25) 18(1.15,1.55) 19(1.65,-1.25) 20(2.15,1.55) 21(2.65,-1.25) 22(3.15,1.55) 23(3.65,-1.25) 24(4.15,1.55) 25(4.65,-1.25) 26(5.15,1.55) 27(5.65,-1.25) 28(6.15,1.55) 29(6.65,-1.25) 30(7.2,1.55)
  rect 0.8x1.7 smd paste-1.7 mask+0: 31(8.15,-1.35) 32(8.15,1.5) 33(-8.4,1.5) 34(-8.4,-1.3)
  silkscreen extent -8.23,-2.93 -7.67,-2.37
LidSwitch [mm]
  rect 1.6x0.8 smd paste-1.6 mask+0: 1(2.575,0)
  rect 2x0.8 smd paste-2 mask+0: 2(-2.8,1.525) 3(-2.8,-1.475)
logo [mm]
  silkscreen extent -4.04,-4.27 4.42,4.26
Modem-Connector [mm]
  rect 0.65x2.286 smd paste-2.286 mask+0: 1(7.5,2.15) 2(6.25,2.15) 3(5,2.15) 4(3.75,2.15) 5(2.5,2.15) 6(1.2,2.15) 7(-0.05,2.15) 8(-1.3,2.15) 9(-2.55,2.15) 10(-3.8,2.15) 11(-5.05,2.15) 12(-6.3,2.15) 13(-7.55,2.15) 14(-7.6,-2.2) 15(-6.35,-2.2) 16(-5.1,-2.2) 17(-3.8,-2.2) 18(-2.55,-2.15) 19(-1.3,-2.2) 20(-0.05,-2.2) 21(1.2,-2.2) 22(2.45,-2.2) 23(3.7,-2.2) 24(4.95,-2.15) 25(6.2,-2.2) 26(7.45,-2.2)
  silkscreen extent -9.23,3.12 -8.67,3.68
PCMCIA [mm]
  rect 0.35x1.9 smd paste-1.9 mask+0: 1(-21.95,2) 2(-21.3,2) 3(-20.65,2) 4(-20,2) 5(-19.4,2) 6(-18.75,2) 7(-18.1,2) 8(-17.5,2) 9(-16.85,2) 10(-16.25,2) 11(-15.6,2) 12(-14.95,2) 13(-14.3,2) 14(-13.7,2) 15(-13.05,2) 16(-12.4,2) 17(-11.8,2) 18(-11.15,2) 19(-10.5,2) 20(-9.85,2) 21(-9.2,2) 22(-8.6,2) 23(-7.95,2) 24(-7.3,2) 25(-6.65,2) 26(-6.05,2) 27(-5.4,2) 28(-4.75,2) 29(-4.1,2) 30(-3.5,2) 31(-2.85,2) 32(-2.25,2) 33(-1.6,2) 34(-0.95,2) 35(-0.3,2) 36(0.35,2) 37(0.95,2) 38(1.6,2) 39(2.25,2) 40(2.85,2) 41(3.5,2) 42(4.15,2) 43(4.8,2) 44(5.4,2) 45(6.05,2) 46(6.65,2) 47(7.3,2) 48(7.95,2) 49(8.55,2) 50(9.2,2) 51(9.85,2) 52(10.5,2) 53(11.1,2) 54(11.75,2) 55(12.4,2) 56(13,2) 57(13.65,2) 58(14.3,2) 59(14.9,2) 60(15.55,2) 61(16.15,2) 62(16.8,2) 63(17.45,2) 64(18.1,2) 65(18.7,2) 66(19.35,2) 67(20,2) 68(20.6,2) 69(21.25,2) 70(21.85,2) 71(-21.95,-2.25) 72(-21.3,-2.25) 73(-20.65,-2.25) 74(-20.05,-2.25) 75(-19.4,-2.25) 76(-18.75,-2.25) 77(-18.15,-2.25) 78(-17.5,-2.25) 79(-16.85,-2.25) 80(-16.25,-2.25) 81(-15.6,-2.25) 82(-14.95,-2.25) 83(-14.35,-2.25) 84(-13.7,-2.25) 85(-13.05,-2.25) 86(-12.4,-2.25) 87(-11.75,-2.25) 88(-11.15,-2.25) 89(-10.5,-2.25) 90(-9.85,-2.25) 91(-9.2,-2.25) 92(-8.6,-2.25) 93(-7.95,-2.25) 94(-7.3,-2.25) 95(-6.65,-2.25) 96(-6.05,-2.25) 97(-5.4,-2.25) 98(-4.75,-2.25) 99(-4.15,-2.25) 100(-3.5,-2.25) 101(-2.85,-2.25) 102(-2.2,-2.25) 103(-1.6,-2.25) 104(-0.95,-2.25) 105(-0.3,-2.25) 106(0.35,-2.25) 107(0.95,-2.25) 108(1.6,-2.25) 109(2.2,-2.25) 110(2.85,-2.25) 111(3.5,-2.25) 112(4.15,-2.25) 113(4.75,-2.25) 114(5.4,-2.25) 115(6.05,-2.25) 116(6.7,-2.25) 117(7.3,-2.25) 118(7.95,-2.25) 119(8.55,-2.25) 120(9.2,-2.25) 121(9.85,-2.25) 122(10.45,-2.25) 123(11.1,-2.25) 124(11.75,-2.25) 125(12.4,-2.25) 126(13,-2.25) 127(13.65,-2.25) 128(14.3,-2.25) 129(14.9,-2.25) 130(15.55,-2.25) 131(16.15,-2.25) 132(16.8,-2.25) 133(17.45,-2.25) 134(18.05,-2.25) 135(18.7,-2.25) 136(19.35,-2.25) 137(19.95,-2.25) 138(20.6,-2.25) 139(21.25,-2.25) 140(21.85,-2.25)
  silkscreen extent -24.03,1.87 -22.87,3.03
Pluto [mm]
  rect 0.45x1.6 smd paste-1.6 mask+0: 1(6.1,7.15) 25(-6.1,7.15) 51(-6.1,-8.1) 75(6.1,-8.1)
  rect 0.3x1.6 smd paste-1.6 mask+0: 2(5.5,7.15) 3(5,7.15) 4(4.5,7.15) 5(4,7.15) 6(3.5,7.15) 7(3,7.15) 8(2.5,7.15) 9(2,7.15) 10(1.5,7.15) 11(1,7.15) 12(0.5,7.15) 13(0,7.15) 14(-0.5,7.15) 15(-1,7.15) 16(-1.5,7.15) 17(-2,7.15) 18(-2.5,7.15) 19(-3,7.15) 20(-3.5,7.15) 21(-4,7.15) 22(-4.5,7.15) 23(-5,7.15) 24(-5.5,7.15) 52(-5.5,-8.1) 53(-5,-8.1) 54(-4.5,-8.1) 55(-4,-8.1) 56(-3.5,-8.1) 57(-3,-8.1) 58(-2.5,-8.1) 59(-2,-8.1) 60(-1.5,-8.1) 61(-1,-8.1) 62(-0.5,-8.1) 63(0,-8.1) 64(0.5,-8.1) 65(1,-8.1) 66(1.5,-8.1) 67(2,-8.1) 68(2.5,-8.1) 69(3,-8.1) 70(3.5,-8.1) 71(4,-8.1) 72(4.5,-8.1) 73(5,-8.1) 74(5.5,-8.1)
  rect 1.6x0.45 smd paste-1.6 mask+0: 26(-7.55,5.6) 50(-7.55,-6.6) 76(7.6,-6.6) 100(7.6,5.6)
  rect 1.6x0.3 smd paste-1.6 mask+0: 27(-7.55,5) 28(-7.55,4.5) 29(-7.55,4) 30(-7.55,3.5) 31(-7.55,3) 32(-7.55,2.5) 33(-7.55,2) 34(-7.55,1.5) 35(-7.55,1) 36(-7.55,0.5) 37(-7.55,0) 38(-7.55,-0.5) 39(-7.55,-1) 40(-7.55,-1.5) 41(-7.55,-2) 42(-7.55,-2.5) 43(-7.55,-3) 44(-7.55,-3.5) 45(-7.55,-4) 46(-7.55,-4.5) 47(-7.55,-5) 48(-7.55,-5.5) 49(-7.55,-6) 77(7.6,-6) 78(7.6,-5.5) 79(7.6,-5) 80(7.6,-4.5) 81(7.6,-4) 82(7.6,-3.5) 83(7.6,-3) 84(7.6,-2.5) 85(7.6,-2) 86(7.6,-1.5) 87(7.6,-1) 88(7.6,-0.5) 89(7.6,0) 90(7.6,0.5) 91(7.6,1) 92(7.6,1.5) 93(7.6,2) 94(7.6,2.5) 95(7.6,3) 96(7.6,3.5) 97(7.6,4) 98(7.6,4.5) 99(7.6,5)
  silkscreen extent 5.61,5.11 6.19,5.69
PS2 [mm]
  rect 0.6x2.2 smd paste-2.2 mask+0: 1(3.6,-2.1) 2(2.6,-2.1) 3(1.6,-2.1) 4(0.55,-2.1) 5(-0.45,-2.1) 6(-1.45,-2.1) 7(-2.45,-2.1) 8(-3.45,-2.1)
  Edge.Cuts lines w0: -5.6,1.7 ccw(c-5.15,1.7) -4.7,1.7 -4.7,3.4 ccw(c-5.15,3.4) -5.6,3.4 -5.6,1.7 ; 4.85,1.7 ccw(c5.3,1.7) 5.75,1.7 5.75,3.4 ccw(c5.3,3.4) 4.85,3.4 4.85,1.7
  Edge.Cuts lines w0.254: -5.6,1.7 ccw(c-5.15,1.7) -4.7,1.7 -4.7,3.4 ccw(c-5.15,3.4) -5.6,3.4 -5.6,1.7 ; -2.8,-0.8 cw(c-2.8,-0.3) -2.8,0.2 -1.7,0.2 cw(c-1.7,-0.3) -1.7,-0.8 -2.8,-0.8 ; 1.8,-0.8 cw(c1.8,-0.3) 1.8,0.2 2.9,0.2 cw(c2.9,-0.3) 2.9,-0.8 1.8,-0.8 ; 4.85,1.7 ccw(c5.3,1.7) 5.75,1.7 5.75,3.4 ccw(c5.3,3.4) 4.85,3.4 4.85,1.7
PSU_Connector [mm]
  rect 0.5x2.5 smd paste-2.5 mask+0: 1(7.45,2.4) 2(6.65,2.4) 3(5.85,2.4) 4(5.05,2.4) 5(4.25,2.4) 6(3.45,2.4) 7(2.6,2.4) 8(1.85,2.4) 9(1,2.4) 10(0.2,2.4) 11(-0.55,2.4) 12(-1.4,2.4) 13(-2.2,2.4) 14(-3,2.4) 15(-3.8,2.4) 16(-4.6,2.4) 17(-5.4,2.4) 18(-6.2,2.4) 19(-7,2.4) 20(-7.8,2.4) 21(-7.85,-2.4) 22(-7,-2.4) 23(-6.2,-2.4) 24(-5.4,-2.4) 25(-4.6,-2.4) 26(-3.8,-2.4) 27(-3,-2.4) 28(-2.2,-2.4) 29(-1.4,-2.4) 30(-0.6,-2.4) 31(0.2,-2.4) 32(1,-2.4) 33(1.8,-2.4) 34(2.6,-2.4) 35(3.4,-2.4) 36(4.2,-2.4) 37(5,-2.4) 38(5.8,-2.4) 39(6.6,-2.4) 40(7.4,-2.4)
  silkscreen extent 7.92,2.17 8.48,2.73
QFN64 [mm]
  rect 1.9x0.45 smd paste-1.9 mask+0: 1(6,-3.6) 16(6,4.1) 33(-5.5,4.1) 48(-5.5,-3.6)
  rect 1.9x0.3 smd paste-1.9 mask+0: 2(6,-3) 3(6,-2.5) 4(6,-2) 5(6,-1.5) 6(6,-1) 7(6,-0.5) 8(6,0) 9(6,0.5) 10(6,1) 11(6,1.5) 12(6,2) 13(6,2.5) 14(6,3) 15(6,3.5) 34(-5.5,3.5) 35(-5.5,3) 36(-5.5,2.5) 37(-5.5,2) 38(-5.5,1.5) 39(-5.5,1) 40(-5.5,0.5) 41(-5.5,0) 42(-5.5,-0.5) 43(-5.5,-1) 44(-5.5,-1.5) 45(-5.5,-2) 46(-5.5,-2.5) 47(-5.5,-3)
  rect 0.45x1.9 smd paste-1.9 mask+0: 17(4.1,6) 32(-3.6,6) 49(-3.6,-5.5) 64(4.1,-5.5)
  rect 0.3x1.9 smd paste-1.9 mask+0: 18(3.5,6) 19(3,6) 20(2.5,6) 21(2,6) 22(1.5,6) 23(1,6) 24(0.5,6) 25(0,6) 26(-0.5,6) 27(-1,6) 28(-1.5,6) 29(-2,6) 30(-2.5,6) 31(-3,6) 50(-3,-5.5) 51(-2.5,-5.5) 52(-2,-5.5) 53(-1.5,-5.5) 54(-1,-5.5) 55(-0.5,-5.5) 56(0,-5.5) 57(0.5,-5.5) 58(1,-5.5) 59(1.5,-5.5) 60(2,-5.5) 61(2.5,-5.5) 62(3,-5.5) 63(3.5,-5.5)
  silkscreen extent -4.3,-4.3 4.8,4.8
QFN-52 [mm]
  rect 0.5x2.2 smd paste-2.2 mask+0: 1(3.6,6.25) 13(-4.4,6.25) 27(-4.4,-6.2) 39(3.6,-6.2)
  rect 0.35x2.2 smd paste-2.2 mask+0: 2(2.85,6.25) 3(2.2,6.25) 4(1.55,6.25) 5(0.9,6.25) 6(0.25,6.25) 7(-0.4,6.25) 8(-1.05,6.25) 9(-1.7,6.25) 10(-2.35,6.25) 11(-3,6.25) 12(-3.65,6.25) 28(-3.65,-6.2) 29(-3,-6.2) 30(-2.35,-6.2) 31(-1.7,-6.2) 32(-1.05,-6.2) 33(-0.4,-6.2) 34(0.25,-6.2) 35(0.9,-6.2) 36(1.55,-6.2) 37(2.2,-6.2) 38(2.85,-6.2)
  rect 2.2x0.5 smd paste-2.2 mask+0: 14(-6.6,4) 26(-6.65,-3.95) 40(5.8,-3.95) 52(5.8,4)
  rect 2.2x0.35 smd paste-2.2 mask+0: 15(-6.65,3.3) 16(-6.65,2.65) 17(-6.65,2) 18(-6.65,1.35) 19(-6.65,0.7) 20(-6.65,0.05) 21(-6.65,-0.6) 22(-6.65,-1.25) 23(-6.65,-1.9) 24(-6.65,-2.55) 25(-6.65,-3.25) 41(5.8,-3.25) 42(5.8,-2.6) 43(5.8,-1.95) 44(5.8,-1.3) 45(5.8,-0.65) 46(5.8,0) 47(5.8,0.65) 48(5.8,1.3) 49(5.8,2) 50(5.8,2.6) 51(5.8,3.25)
  silkscreen extent 3.28,3.68 3.92,4.32
QFN-80 [mm]
  rect 0.45x1.8 smd paste-1.8 mask+0: 1(4.55,6.75) 20(-5.15,6.75) 41(-5.15,-6.7) 60(4.55,-6.7)
  rect 0.3x1.8 smd paste-1.8 mask+0: 2(4,6.75) 3(3.5,6.75) 4(3,6.75) 5(2.5,6.75) 6(2,6.75) 7(1.5,6.75) 8(1,6.75) 9(0.5,6.75) 10(0,6.75) 11(-0.5,6.75) 12(-1,6.75) 13(-1.5,6.75) 14(-2,6.75) 15(-2.5,6.75) 16(-3,6.75) 17(-3.5,6.75) 18(-4,6.75) 19(-4.55,6.75) 42(-4.55,-6.7) 43(-4,-6.7) 44(-3.5,-6.7) 45(-3,-6.7) 46(-2.5,-6.7) 47(-2,-6.7) 48(-1.5,-6.7) 49(-1,-6.7) 50(-0.5,-6.7) 51(0,-6.7) 52(0.5,-6.7) 53(1,-6.7) 54(1.5,-6.7) 55(2,-6.7) 56(2.5,-6.7) 57(3,-6.7) 58(3.5,-6.7) 59(4,-6.7)
  rect 1.8x0.45 smd paste-1.8 mask+0: 21(-6.95,4.8) 40(-6.95,-4.8) 61(6.55,-4.8) 80(6.55,4.8)
  rect 1.8x0.3 smd paste-1.8 mask+0: 22(-6.95,4.25) 23(-6.95,3.75) 24(-6.95,3.25) 25(-6.95,2.75) 26(-6.95,2.25) 27(-6.95,1.75) 28(-6.95,1.25) 29(-6.95,0.75) 30(-6.95,0.25) 31(-6.95,-0.25) 32(-6.95,-0.75) 33(-6.95,-1.25) 34(-6.95,-1.75) 35(-6.95,-2.25) 36(-6.95,-2.75) 37(-6.95,-3.25) 38(-6.95,-3.75) 39(-6.95,-4.2) 62(6.55,-4.25) 63(6.55,-3.75) 64(6.55,-3.25) 65(6.55,-2.75) 66(6.55,-2.25) 67(6.55,-1.75) 68(6.55,-1.25) 69(6.55,-0.75) 70(6.55,-0.25) 71(6.55,0.25) 72(6.55,0.75) 73(6.55,1.25) 74(6.55,1.75) 75(6.55,2.25) 76(6.55,2.75) 77(6.55,3.25) 78(6.55,3.75) 79(6.55,4.2)
  silkscreen extent 4.34,4.49 5.06,5.21
QFN-100 [mm]
  rect 0.4x1.9 smd paste-1.9 mask+0: 1(-6.6,-7.575) 25(5.575,-7.575) 51(5.575,7.925) 75(-6.65,7.925)
  rect 0.3x1.9 smd paste-1.9 mask+0: 2(-6,-7.575) 3(-5.5,-7.575) 4(-5,-7.575) 5(-4.5,-7.575) 6(-4,-7.575) 7(-3.5,-7.575) 8(-3,-7.575) 9(-2.5,-7.575) 10(-2,-7.575) 11(-1.5,-7.575) 12(-1,-7.575) 13(-0.5,-7.575) 14(0,-7.575) 15(0.5,-7.575) 16(1,-7.575) 17(1.5,-7.575) 18(2,-7.575) 19(2.5,-7.575) 20(3,-7.575) 21(3.5,-7.575) 22(4,-7.575) 23(4.5,-7.575) 24(5,-7.575) 52(5,7.925) 53(4.5,7.925) 54(4,7.925) 55(3.5,7.925) 56(3,7.925) 57(2.5,7.925) 58(2,7.925) 59(1.5,7.925) 60(1,7.925) 61(0.5,7.925) 62(0,7.925) 63(-0.55,7.925) 64(-1.05,7.925) 65(-1.55,7.925) 66(-2.05,7.925) 67(-2.55,7.925) 68(-3.05,7.925) 69(-3.55,7.925) 70(-4.05,7.925) 71(-4.55,7.925) 72(-5.05,7.925) 73(-5.55,7.925) 74(-6.05,7.925)
  rect 1.9x0.4 smd paste-1.9 mask+0: 26(7.275,-6.075) 50(7.275,6.075) 76(-8.225,6.075) 100(-8.225,-6.075)
  rect 1.9x0.3 smd paste-1.9 mask+0: 27(7.275,-5.5) 28(7.275,-5) 29(7.275,-4.5) 30(7.275,-4) 31(7.275,-3.5) 32(7.275,-3) 33(7.275,-2.5) 34(7.275,-2) 35(7.275,-1.5) 36(7.275,-1) 37(7.275,-0.5) 38(7.275,0) 39(7.275,0.5) 40(7.275,1) 41(7.275,1.5) 42(7.275,2) 43(7.275,2.5) 44(7.275,3) 45(7.275,3.5) 46(7.275,4) 47(7.275,4.5) 48(7.275,5) 49(7.275,5.5) 77(-8.225,5.5) 78(-8.225,5) 79(-8.225,4.5) 80(-8.225,4) 81(-8.225,3.5) 82(-8.225,3) 83(-8.225,2.5) 84(-8.225,2) 85(-8.225,1.5) 86(-8.225,0.95) 87(-8.225,0.5) 88(-8.225,0) 89(-8.225,-0.55) 90(-8.225,-1.05) 91(-8.225,-1.55) 92(-8.225,-2.05) 93(-8.225,-2.5) 94(-8.225,-3) 95(-8.225,-3.5) 96(-8.225,-4.05) 97(-8.225,-4.5) 98(-8.225,-5.05) 99(-8.225,-5.5)
  silkscreen extent -8.89,-8.04 -7.91,-7.06
R-array#1 [mm]
  rect 0.35x1.2 smd paste-1.2 mask+0: 1(1.225,1) 2(0.425,1) 3(-0.375,1) 4(-1.175,1) 5(-1.175,-0.85) 6(-0.375,-0.85) 7(0.45,-0.85) 8(1.225,-0.85)
R-array#2 [mm]
  rect 0.35x1.2 smd paste-1.2 mask+0: 1(-1.225,-1) 2(-0.425,-1) 3(0.375,-1) 4(1.175,-1) 5(1.175,0.85) 6(0.375,0.85) 7(-0.45,0.85) 8(-1.225,0.85)
R_0402_1005Metric#1 [mm]
  rrect25% 0.54x0.64 smd paste-0.64 mask+0: 1(-0.51,0) 2(0.51,0)
  silkscreen extent -0.95,-0.5 0.95,0.5
R_0402_1005Metric#2 [mm]
  rrect25% 0.54x0.64 smd paste-0.64 mask+0: 1(0.51,0) 2(-0.51,0)
  silkscreen extent -0.95,-0.5 0.95,0.5
R_0603_1608Metric#1 [mm]
  rrect25% 0.8x0.95 smd paste-0.95 mask+0: 1(-0.825,0) 2(0.825,0)
  silkscreen extent -1.5,-0.8 1.5,0.8
R_0603_1608Metric#2 [mm]
  rrect25% 0.8x0.95 smd paste-0.95 mask+0: 1(0.825,0) 2(-0.825,0)
  silkscreen extent -1.5,-0.8 1.5,0.8
R_0805_2012Metric#1 [mm]
  rrect24% 1.025x1.4 smd paste-1.4 mask+0: 1(-0.913,0) 2(0.913,0)
  silkscreen extent -0.23,-0.73 0.23,0.73
R_0805_2012Metric#2 [mm]
  rrect24% 1.025x1.4 smd paste-1.4 mask+0: 1(0.913,0) 2(-0.913,0)
  silkscreen extent -1.7,-1 1.7,1
R_1206_3216Metric#1 [mm]
  rrect22% 1.125x1.75 smd paste-1.75 mask+0: 1(-1.462,0) 2(1.462,0)
  silkscreen extent -2.3,-1.2 2.3,1.2
R_1206_3216Metric#2 [mm]
  rrect22% 1.125x1.75 smd paste-1.75 mask+0: 1(1.462,0) 2(-1.462,0)
  silkscreen extent -2.3,-1.2 2.3,1.2
R_1206_3216Metric_Pad1.30x1.75mm_HandSolder [mm]
  rrect19% 1.3x1.75 smd paste-1.75 mask+0: 1(1.55,0) 2(-1.55,0)
  silkscreen extent -0.73,-0.91 0.73,0.91
"RAM Module" [mm]
  rect 2.3x0.3 smd paste-2.3 mask+0: 1(-2.5,-7.4) 2(-2.5,-6.9) 3(-2.5,-6.4) 4(-2.5,-5.9) 5(-2.5,-5.4) 6(-2.5,-4.9) 7(-2.5,-4.4) 8(-2.5,-3.9) 9(-2.5,-3.4) 10(-2.5,-2.9) 11(-2.55,-2.4) 12(-2.55,-1.9) 13(-2.55,-1.4) 14(-2.55,-0.9) 15(-2.55,-0.4) 16(-2.55,0.1) 17(-2.55,0.6) 18(-2.55,1.1) 19(-2.55,1.6) 20(-2.55,2.1) 21(-2.55,2.6) 22(-2.55,3.1) 23(-2.55,3.6) 24(-2.55,4.1) 25(-2.55,4.6) 26(-2.55,5.1) 27(-2.55,5.6) 28(-2.55,6.1) 29(-2.55,6.6) 30(-2.55,7.1) 31(2.45,7.1) 32(2.45,6.6) 33(2.45,6.1) 34(2.45,5.6) 35(2.45,5.1) 36(2.45,4.6) 37(2.45,4.1) 38(2.45,3.6) 39(2.45,3.1) 40(2.45,2.6) 41(2.45,2.1) 42(2.45,1.6) 43(2.45,1.1) 44(2.45,0.6) 45(2.45,0.1) 46(2.45,-0.4) 47(2.45,-0.9) 48(2.45,-1.4) 49(2.45,-1.9) 50(2.45,-2.4) 51(2.45,-2.9) 52(2.45,-3.4) 53(2.45,-3.9) 54(2.45,-4.4) 55(2.45,-4.9) 56(2.45,-5.4) 57(2.45,-5.9) 58(2.45,-6.4) 59(2.45,-6.9) 60(2.45,-7.4)
  rect 1.4x1.9 smd paste-1.9 mask+0: 61(0,-9.05) 62(0,8.7)
RAMchip [mm]
  rect 0.4x1.3 smd paste-1.3 mask+0: 1(9.225,5.475) 2(8.425,5.475) 3(7.625,5.475) 4(6.825,5.475) 5(6.025,5.475) 6(5.225,5.475) 7(4.425,5.475) 8(3.625,5.475) 9(2.825,5.475) 10(2.025,5.475) 11(1.175,5.475) 12(-2.025,5.475) 13(-2.825,5.475) 14(-3.625,5.475) 15(-4.425,5.475) 16(-5.225,5.475) 17(-6.025,5.475) 18(-6.825,5.475) 19(-7.625,5.475) 20(-8.425,5.475) 21(-9.225,5.475) 22(-10.025,5.475) 23(-10.025,-5.8) 24(-9.225,-5.8) 25(-8.425,-5.8) 26(-7.625,-5.8) 27(-6.825,-5.8) 28(-6.025,-5.8) 29(-5.225,-5.8) 30(-4.425,-5.8) 31(-3.625,-5.8) 32(-2.775,-5.8) 33(-2.025,-5.8) 34(1.175,-5.8) 35(2.025,-5.8) 36(2.825,-5.8) 37(3.625,-5.8) 38(4.425,-5.8) 39(5.225,-5.8) 40(6.025,-5.8) 41(6.825,-5.8) 42(7.625,-5.8) 43(8.425,-5.8) 44(9.225,-5.8)
  silkscreen extent 8.67,3.56 9.39,4.29
SanDisk [mm]
  rect 0.8x1.3 smd paste-1.3 mask+0: 1(7.65,6.375) 2(6.35,6.375) 3(5.1,6.375) 4(3.8,6.375) 5(2.55,6.375) 6(1.25,6.375) 7(0,6.375) 8(-1.3,6.375) 9(-2.55,6.375) 10(-3.85,6.375) 11(-5.1,6.375) 12(-6.4,6.375) 13(-7.65,6.375) 14(-8.9,6.375) 15(-8.9,-6.975) 16(-7.65,-6.975) 17(-6.35,-6.975) 18(-5.1,-6.975) 19(-3.8,-6.975) 20(-2.55,-6.975) 21(-1.25,-6.975) 22(0,-6.975) 23(1.3,-6.975) 24(2.55,-6.975) 25(3.85,-6.975) 26(5.1,-6.975) 27(6.4,-6.975) 28(7.65,-6.975)
  silkscreen extent 7.14,4.31 7.86,5.04
SOIC-8 [mm]
  rect 3x0.6 smd paste-3 mask+0: 1(2.95,-1.95) 2(2.95,-0.65) 3(2.95,0.6) 4(2.95,1.9) 5(-2.9,1.905) 6(-2.9,0.635) 7(-2.9,-0.65) 8(-2.9,-1.95)
  silkscreen extent -1.95,-2.8 2.94,2.56
SOIC-8-narrow [mm]
  rect 2.5x0.6 smd paste-2.5 mask+0: 1(-2.8,1.8) 2(-2.85,0.5) 3(-2.85,-0.75) 4(-2.85,-2) 5(2.3,-2) 6(2.3,-0.75) 7(2.35,0.5) 8(2.35,1.75)
  silkscreen extent -1.47,0.93 -0.83,1.57
soic-8-small [mm]
  rect 1.3x0.35 smd paste-1.3 mask+0: 1(-2.95,0.95) 2(-2.95,0.3) 3(-2.95,-0.35) 4(-2.95,-1) 5(2.95,-1) 6(2.95,-0.35) 7(2.95,0.3) 8(2.95,0.95)
  silkscreen extent -2.03,0.62 -1.67,0.98
SOIC-16W [mm]
  rect 3x0.6 smd paste-3 mask+0: 1(2.85,-4.445) 2(2.85,-3.175) 3(2.85,-1.905) 4(2.85,-0.65) 5(2.85,0.635) 6(2.85,1.9) 7(2.85,3.175) 8(2.9,4.445) 9(-3,4.45) 10(-3,3.175) 11(-3,1.9) 12(-3,0.65) 13(-3,-0.65) 14(-3,-1.95) 15(-3,-3.175) 16(-2.95,-4.45)
  silkscreen extent -2.76,-5.34 3.79,5.21
SOP48 [mm]
  rect 1.9x0.6 smd paste-1.9 mask+0: 1(7.3,-9.55) 2(7.3,-8.75) 3(7.3,-7.95) 4(7.3,-7.15) 5(7.3,-6.35) 6(7.3,-5.55) 7(7.3,-4.75) 8(7.3,-3.95) 9(7.3,-3.15) 10(7.3,-2.35) 11(7.3,-1.55) 12(7.3,-0.75) 13(7.3,0.05) 14(7.3,0.85) 15(7.3,1.65) 16(7.3,2.45) 17(7.3,3.25) 18(7.3,4.05) 19(7.3,4.85) 20(7.3,5.65) 21(7.3,6.45) 22(7.3,7.25) 23(7.3,8.05) 24(7.3,8.85) 25(-7.75,8.85) 26(-7.75,8.05) 27(-7.75,7.25) 28(-7.75,6.45) 29(-7.75,5.65) 30(-7.75,4.85) 31(-7.75,4.05) 32(-7.75,3.25) 33(-7.75,2.45) 34(-7.75,1.65) 35(-7.75,0.85) 36(-7.75,0.05) 37(-7.75,-0.75) 38(-7.75,-1.55) 39(-7.75,-2.35) 40(-7.75,-3.15) 41(-7.75,-3.95) 42(-7.775,-4.75) 43(-7.775,-5.55) 44(-7.775,-6.35) 45(-7.775,-7.15) 46(-7.775,-7.95) 47(-7.775,-8.75) 48(-7.775,-9.55)
  silkscreen extent 4.27,-9.33 5.33,-8.27
SOP-16 [mm]
  rect 2.2x0.6 smd paste-2.2 mask+0: 1(3.45,-4.45) 2(3.45,-3.175) 3(3.45,-1.9) 4(3.45,-0.635) 5(3.45,0.635) 6(3.45,1.905) 7(3.45,3.2) 8(3.45,4.445) 9(-3.5,4.445) 10(-3.5,3.175) 11(-3.5,1.905) 12(-3.5,0.635) 13(-3.5,-0.635) 14(-3.5,-1.95) 15(-3.5,-3.2) 16(-3.5,-4.45)
  silkscreen extent -2.38,-5.34 3.4,5.26
SOP-24 [mm]
  rect 0.6x2.5 smd paste-2.5 mask+0: 1(6.7,4.75) 2(5.45,4.75) 3(4.15,4.75) 4(2.85,4.75) 5(1.6,4.75) 6(0.3,4.75) 7(-0.95,4.75) 8(-2.2,4.75) 9(-3.5,4.75) 10(-4.75,4.75) 11(-6.05,4.75) 12(-7.3,4.75) 13(-7.3,-6.05) 14(-6.05,-6.05) 15(-4.75,-6.05) 16(-3.5,-6.05) 17(-2.25,-6.05) 18(-0.95,-6.05) 19(0.3,-6.05) 20(1.6,-6.05) 21(2.85,-6.05) 22(4.15,-6.05) 23(5.4,-6.05) 24(6.7,-6.05)
  silkscreen extent 6.28,1.98 7.12,2.82
SOT-23#1 [mm]
  rrect25% 1.475x0.6 smd paste-1.475 mask+0: 1(0.937,-0.95) 2(0.937,0.95) 3(-0.937,0)
  silkscreen extent -0.65,-1.84 1.4,1.56
SOT-23#2 [mm]
  rrect25% 0.9x0.8 smd paste-0.9 mask+0: 1(-1,0.95) 2(-1,-0.95) 3(1,0)
  silkscreen extent -1.8,-1.8 1.8,1.8
SOT-23#3 [mm]
  rrect25% 0.9x0.8 smd paste-0.9 mask+0: 1(1,-0.95) 2(1,0.95) 3(-1,0)
  silkscreen extent -1.8,-1.8 1.8,1.8
SOT-23-5#1 [mm]
  rrect25% 1.325x0.6 smd paste-1.325 mask+0: 1(-1.138,0.95) 2(-1.138,0) 3(-1.138,-0.95) 4(1.138,-0.95) 5(1.138,0.95)
  silkscreen extent -1.54,-1.56 0.8,1.84
SOT-23-5#2 [mm]
  rrect25% 1.325x0.6 smd paste-1.325 mask+0: 1(1.138,-0.95) 2(1.138,0) 3(1.138,0.95) 4(-1.138,0.95) 5(-1.138,-0.95)
  silkscreen extent -0.8,-1.84 1.54,1.56
SOT-89-3#1 [mm]
  rrect25% 1.3x0.9 smd paste-1.3 mask+0: 1(-1.95,1.5) 3(-1.95,-1.5)
  rect 1.475x0.9 smd paste-1.475 mask+0: 2(-1.863,0)
  F.Cu region: 2,-0.867 -1.125,-0.867 -1.125,0.867 2,0.867
  silkscreen extent -2.01,-2.36 1.36,2.54
SOT-89-3#2 [mm]
  rrect25% 1.3x0.9 smd paste-1.3 mask+0: 1(1.95,-1.5) 3(1.95,1.5)
  rect 1.475x0.9 smd paste-1.475 mask+0: 2(1.863,0)
  F.Cu region: -2,-0.867 1.125,-0.867 1.125,0.867 -2,0.867
  silkscreen extent -1.36,-2.54 2.01,2.36
SOT-353#1 [mm]
  rect 1.2x0.4 smd paste-1.2 mask+0: 1(-0.85,0.65) 2(-0.85,0) 3(-0.85,-0.65) 4(0.85,-0.65) 5(0.85,0.65)
  silkscreen extent -1.32,-1.16 0.7,1.44
SOT-353#2 [mm]
  rect 1.2x0.4 smd paste-1.2 mask+0: 1(0.85,-0.65) 2(0.85,0) 3(0.85,0.65) 4(-0.85,0.65) 5(-0.85,-0.65)
  silkscreen extent -0.7,-1.44 1.32,1.16
SOT-416#1 [mm]
  rrect25% 0.6x0.5 smd paste-0.6 mask+0: 1(-0.65,0.5) 2(-0.65,-0.5) 3(0.65,0)
  silkscreen extent -1.45,-0.96 0.51,0.96
SOT-416#2 [mm]
  rrect25% 0.6x0.5 smd paste-0.6 mask+0: 1(0.65,-0.5) 2(0.65,0.5) 3(-0.65,0)
  silkscreen extent -0.51,-0.96 1.45,0.96
SOT-416L#1 [mm]
  rect 0.6x1.1 smd paste-1.1 mask+0: 1(0.45,-0.75) 2(-0.55,-0.75) 3(-0.05,0.8)
SOT-416L#2 [mm]
  rect 0.6x1.1 smd paste-1.1 mask+0: 1(-0.45,0.75) 2(0.55,0.75) 3(0.05,-0.8)
SOT-523#1 [mm]
  rrect25% 0.51x0.4 smd paste-0.51 mask+0: 1(-0.645,0.5) 2(-0.645,-0.5) 3(0.645,0)
  silkscreen extent -1.4,-0.9 0.65,0.9
SOT-523#2 [mm]
  rrect25% 0.51x0.4 smd paste-0.51 mask+0: 1(0.645,-0.5) 2(0.645,0.5) 3(-0.645,0)
  silkscreen extent -0.65,-0.9 1.4,0.9
SPKR [mm]
  rect 0.8x2 smd paste-2 mask+0: 1(0.65,-2.2) 2(-0.65,-2.2)
  rect 1.5x2.3 smd paste-2.3 mask+0: 3(3,0.5) 4(-3,0.5)
  Edge.Cuts circle w0.254: c1.7,1.75 r0.424
  Edge.Cuts circle w0.254: c-1.7,1.75 r0.424
sso-8 [mm]
  rect 1.2x0.4 smd paste-1.2 mask+0: 1(-1.75,0.95) 2(-1.75,0.3) 3(-1.75,-0.35) 4(-1.75,-1) 5(1.75,-1) 6(1.75,-0.35) 7(1.75,0.3) 8(1.75,0.95)
  silkscreen extent -1.01,0.59 -0.69,0.91
SSOP-8_2.95x2.8mm_P0.65mm [mm]
  rect 1.6x0.3 smd paste-1.6 mask+0: 1(1.7,-0.975) 2(1.7,-0.325) 3(1.7,0.325) 4(1.7,0.975) 5(-1.7,0.975) 6(-1.7,0.325) 7(-1.7,-0.325) 8(-1.7,-0.975)
  silkscreen extent -1.5,-1.73 2.09,1.5
SSOP-24_5.3x8.2mm_P0.65mm [mm]
  rect 1.75x0.45 smd paste-1.75 mask+0: 1(3.6,-3.575) 2(3.6,-2.925) 3(3.6,-2.275) 4(3.6,-1.625) 5(3.6,-0.975) 6(3.6,-0.325) 7(3.6,0.325) 8(3.6,0.975) 9(3.6,1.625) 10(3.6,2.275) 11(3.6,2.925) 12(3.6,3.575) 13(-3.6,3.575) 14(-3.6,2.925) 15(-3.6,2.275) 16(-3.6,1.625) 17(-3.6,0.975) 18(-3.6,0.325) 19(-3.6,-0.325) 20(-3.6,-0.975) 21(-3.6,-1.625) 22(-3.6,-2.275) 23(-3.6,-2.925) 24(-3.6,-3.575)
  silkscreen extent -2.88,-4.41 3.61,4.33